# EAGLE board pontos_cegos_pth (EAGLE 7.6.0)
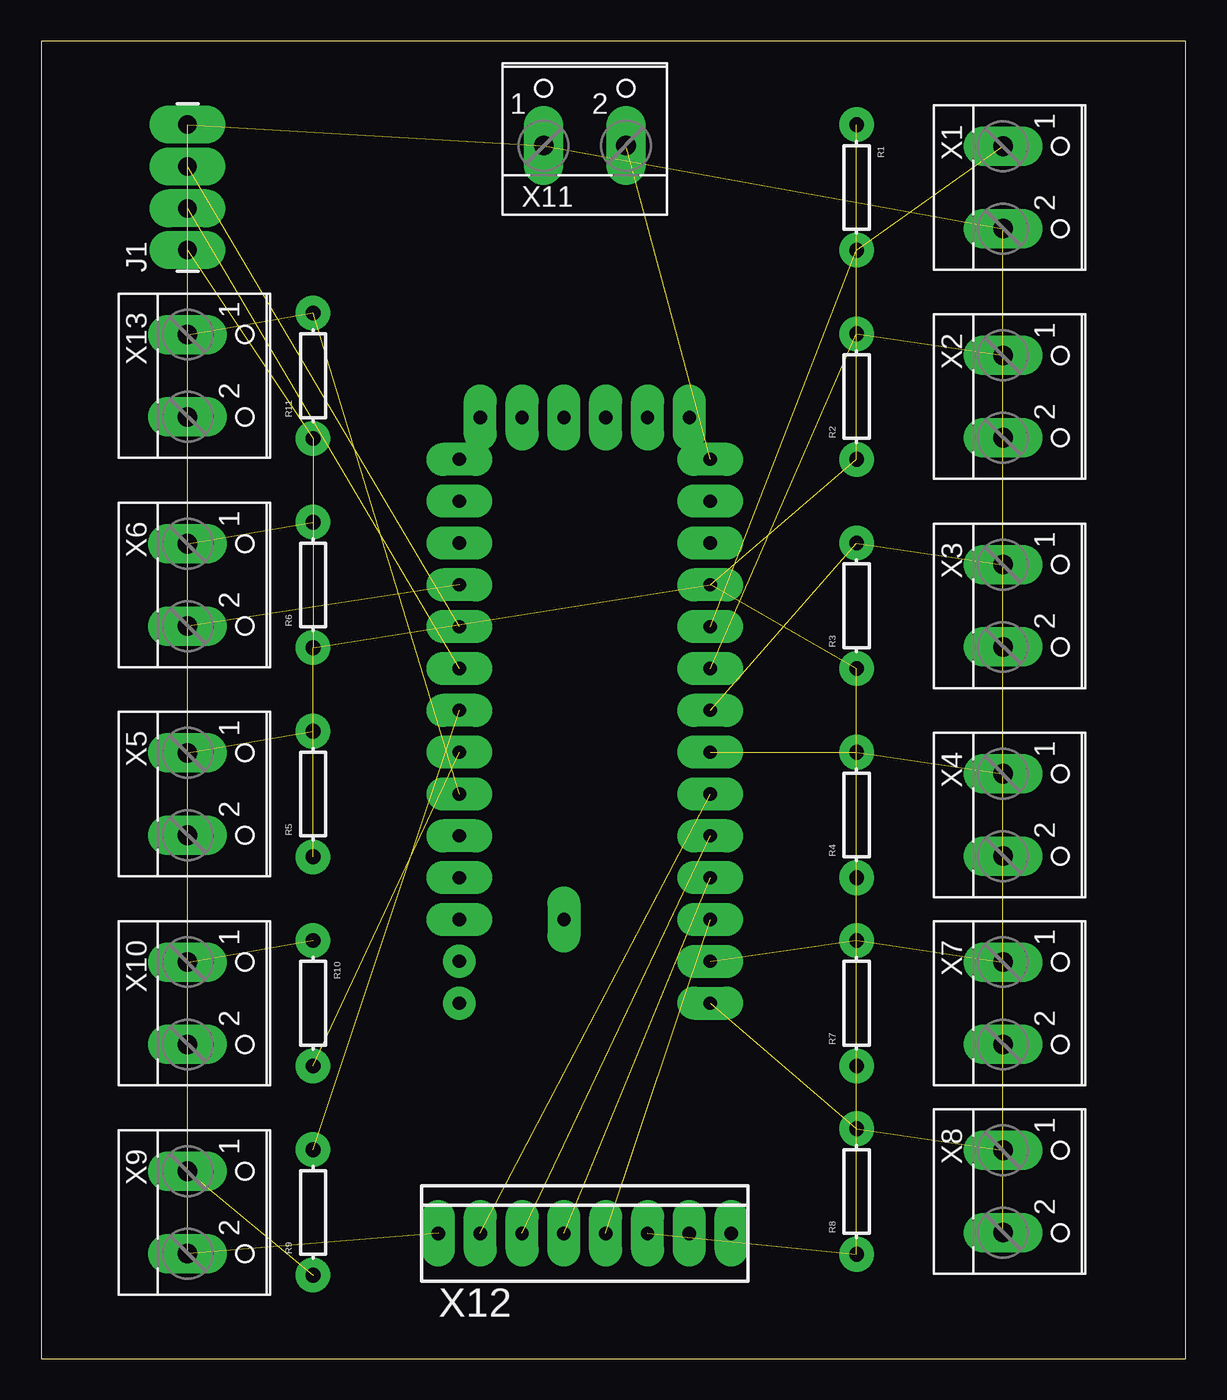
[diagram p0: board, top side]
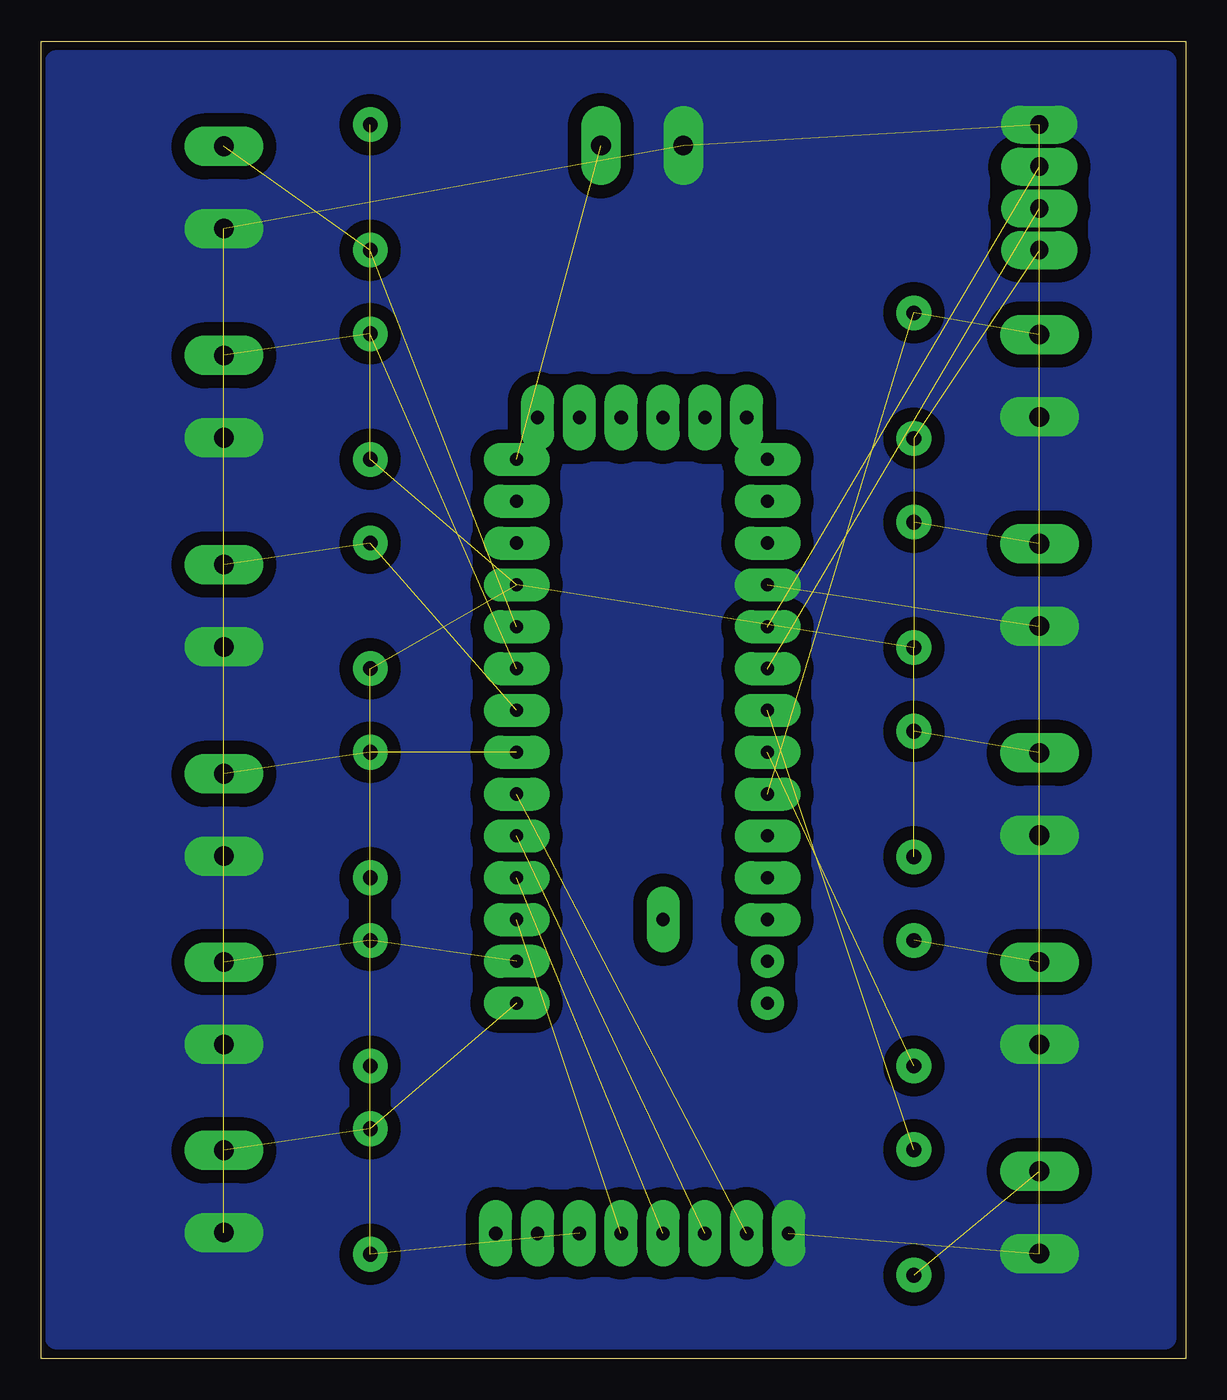
[diagram p1: board, bottom side, seen from below]

Size 69.52 x 80 mm. Coordinates in mm from the lower left corner, seen from the top.
Outline: 0,0 69.52,0 69.52,80 0,80 0,0
Copper layers (1*16): Top 0.035mm / dielectric 1.5mm / Bottom 0.035mm
Design rules "hobby": minimum track width 0.8mm, minimum drill 0.8mm, track to track 0.8mm, track to pad 0.8mm, pad to pad 0.45mm, via to via 0.8mm, smd to smd 8mil, copper to edge 10mil, drill to drill 8mil, minimum pad ring 0.6mm, minimum via ring 0.6mm, stop-mask expansion 0mil, vias tented up to drill 0mil, thermal gap 10mil
Net classes: 0 default: width 0.406 mm

## Footprints (pad centres in the part's own frame; a part is rotated, then mirrored left to right if it is on the bottom)
1X04_LONGPADS = drill 1.118 pad 1.88 long: 1 0,0; 2 2.54,0; 3 5.08,0; 4 7.62,0
AXIAL-0.3 = drill 0.9 pad 1.88: P$1 -3.81,0; P$2 3.81,0
ABK-PRO-MINI = drill 0.8 long: A0 10.16,-3.81; A1 10.16,-6.35; A2 10.16,-8.89; A3 10.16,-11.43; A6 10.16,-24.13; A7 10.16,-26.67; D2 -5.08,-3.81; D3 -5.08,-6.35; D4 -5.08,-8.89; D5 -5.08,-11.43; D6 -5.08,-13.97; D7 -5.08,-16.51; D8 -5.08,-19.05; D9 -5.08,-21.59; D10 10.16,-21.59; D11 10.16,-19.05; D12 10.16,-16.51; D13 10.16,-13.97; DTR 8.89,8.89; GND 10.16,3.81; GND1 -5.08,-1.27; GND2 -3.81,8.89; GND3 -1.27,8.89; GND4 1.27,-21.59; RAW 10.16,6.35; RST 10.16,1.27; RST1 -5.08,1.27; RX1 -5.08,3.81; RX1-1 3.81,8.89; TX0 -5.08,6.35; TX0-1 6.35,8.89; VCC 10.16,-1.27; VCC1 1.27,8.89 | drill 0.8: A4 -5.08,-26.67; A5 -5.08,-24.13
W237-102 = drill 1.194 long: 1 -2.5,-1.27; 2 2.5,-1.27
741256-49 = drill 0.813 pad 1.27 long: 1 -8.89,0; 2 -6.35,0; 3 -3.81,0; 4 -1.27,0; 5 1.27,0; 6 3.81,0; 7 6.35,0; 8 8.89,0

## Placement (x,y rotation side)
J1  [1X04_LONGPADS]  8.89,67.31 90 top
R1  [AXIAL-0.3]  49.53,71.12 270 top
R2  [AXIAL-0.3]  49.53,58.42 90 top
R3  [AXIAL-0.3]  49.53,45.72 90 top
R4  [AXIAL-0.3]  49.53,33.02 90 top
R5  [AXIAL-0.3]  16.51,34.29 90 top
R6  [AXIAL-0.3]  16.51,46.99 90 top
R7  [AXIAL-0.3]  49.53,21.59 90 top
R8  [AXIAL-0.3]  49.53,10.16 90 top
R9  [AXIAL-0.3]  16.51,8.89 90 top
R10  [AXIAL-0.3]  16.51,21.59 270 top
R11  [AXIAL-0.3]  16.51,59.69 90 top
U$1  ABK-PRO-MINI  [ABK-PRO-MINI]  30.48,48.26 0 top
X1  [W237-102]  59.69,71.12 270 top
X2  [W237-102]  59.69,58.42 270 top
X3  [W237-102]  59.69,45.72 270 top
X4  [W237-102]  59.69,33.02 270 top
X5  [W237-102]  10.16,34.29 270 top
X6  [W237-102]  10.16,46.99 270 top
X7  [W237-102]  59.69,21.59 270 top
X8  [W237-102]  59.69,10.16 270 top
X9  [W237-102]  10.16,8.89 270 top
X10  [W237-102]  10.16,21.59 270 top
X11  [W237-102]  33.02,74.93 0 top
X12  741256-49  [741256-49]  33.02,7.62 0 top
X13  [W237-102]  10.16,59.69 270 top

## Library data of the parts
J1 = SparkFun-Connectors; PROD_ID: CONN-09696
R1-R11 = SparkFun-Resistors
U$1 = Arduino-clone
X1-X11 X13 = con-wago-500; MPN: 237-102; OC_FARNELL: unknown; OC_NEWARK: 70K9898
X12 = con-conrad

## Nets
A0: R1.P$2 U$1.A0 X1.1
A1: R2.P$2 U$1.A1 X2.1
A2: R3.P$2 U$1.A2 X3.1
A3: R4.P$2 U$1.A3 X4.1
A4: R5.P$2 X5.1
A5: R6.P$2 X6.1
A6: R7.P$2 U$1.A6 X7.1
A7: R8.P$2 U$1.A7 X8.1
D2: J1.3 U$1.D2
D3: J1.2 U$1.D3
D4: R9.P$2 U$1.D4
D5: R10.P$2 U$1.D5
D6: R11.P$2 U$1.D6 X13.1
D10: U$1.D10 X12.5
D11: U$1.D11 X12.4
D12: U$1.D12 X12.3
D13: U$1.D13 X12.2
GND: J1.4 U$1.GND1 X1.2 X2.2 X3.2 X4.2 X5.2 X6.2 X7.2 X8.2 X9.2 X10.2 X11.1 X12.1 X13.2
N$5: R9.P$1 X9.1
N$14: R10.P$1 X10.1
RAW: U$1.RAW X11.2
VCC: J1.1 R1.P$1 R2.P$1 R3.P$1 R4.P$1 R5.P$1 R6.P$1 R7.P$1 R8.P$1 R11.P$1 U$1.VCC X12.6

## Tracks (layer width: path | path; a pad name or v marks a point on that pad's centre or on a via)
A0  (2 unrouted)
A1  (2 unrouted)
A2  (2 unrouted)
A3  (2 unrouted)
A4  (1 unrouted)
A5  (1 unrouted)
A6  (2 unrouted)
A7  (2 unrouted)
D2  (1 unrouted)
D3  (1 unrouted)
D4  (1 unrouted)
D5  (1 unrouted)
D6  (2 unrouted)
D10  (1 unrouted)
D11  (1 unrouted)
D12  (1 unrouted)
D13  (1 unrouted)
GND  (14 unrouted)
  pour Bottom (no thermals): 1.27,1.27 68.58,1.27 68.58,78.74 1.27,78.74
N$5  (1 unrouted)
N$14  (1 unrouted)
RAW  (1 unrouted)
VCC  (11 unrouted)